# Altium PCB StartV2.PcbDoc
Units mil, origin at the board's own origin, x right, y up, seen from the top; angles counter-clockwise.
Board outline 3760 x 2060 mil, 2 copper layers (Top Layer, Bottom Layer); 42 components, 54 nets, 236 pads, 0 vias.
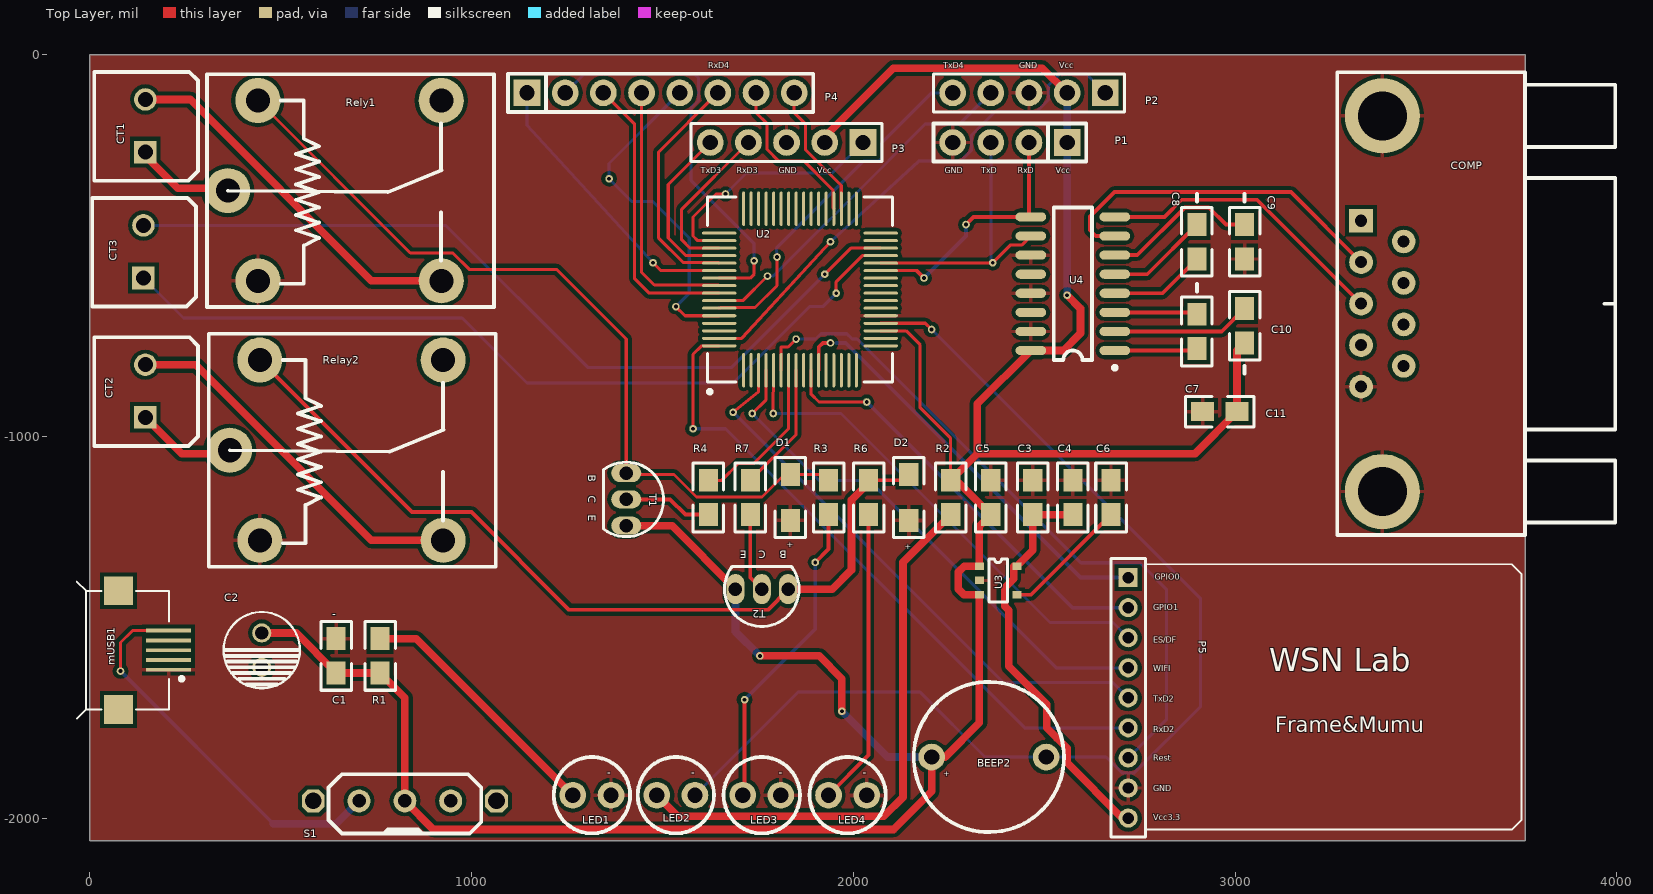
[diagram p0: Top Layer view]
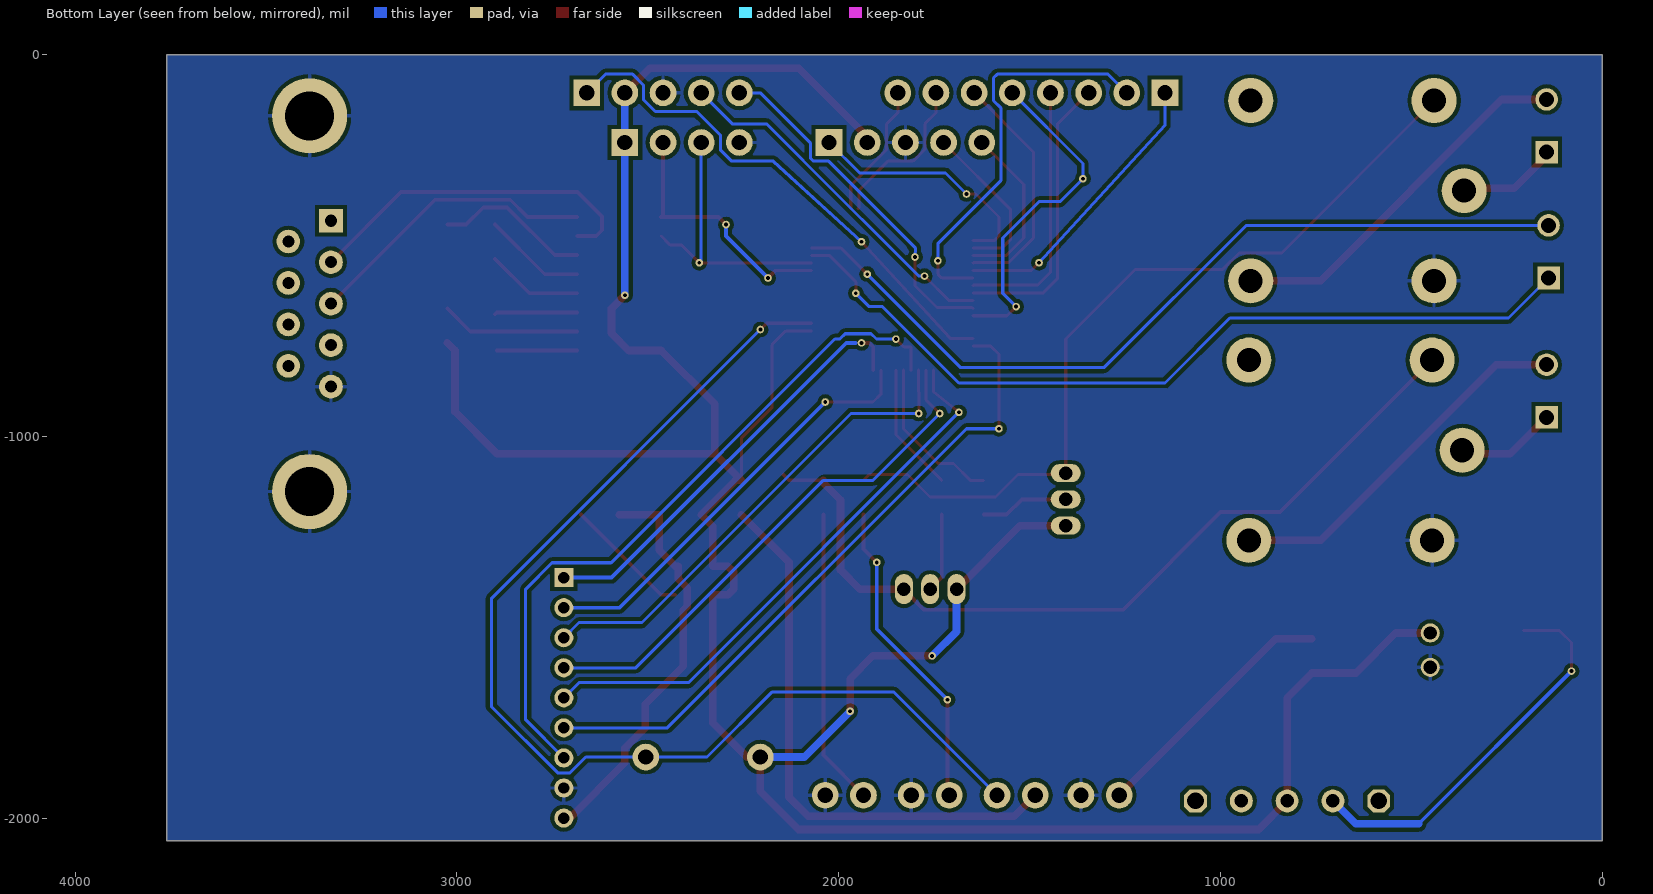
[diagram p1: Bottom Layer view, seen from below]

## Layer stack, top to bottom
Top Layer: signal copper 1.4
Dielectric: dielectric 12.6, FR-4, Dk 4.8
Bottom Layer: signal copper 1.4

## Board outline
0,-2060 3760,-2060 3760,0 0,0

## Design rules (kind name [scope] priority, off if disabled: settings)
Clearance [All] p1: gap=10
HoleSize [All] p1: absolutevalues=TRUE maxlimit=130 minlimit=1 maxpercent=80.000 minpercent=20.000
PolygonConnect [All] p1: connectstyle=Relief reliefconductorwidth=10 reliefentries=4 polygonreliefangle="90 Angle" airgapwidth=10
RoutingVias [All] p1: holewidth=28 width=50 viastyle="Through Hole" minholewidth=28 minwidth=50 maxholewidth=28 maxwidth=50
SolderMaskExpansion [All] p1: expansion=4
Width [All] p1: maxlimit=30 minlimit=6 preferedwidth=10
27 further rules are at their usual default settings.

## Components (designator, comment, footprint, x,y, rotation, side; value= is the part's Value field where it differs from the comment)
BEEP2 "BEEP" BEEP 2205,-1840 r0 top
C1 "104" CAP 645,-1530 r270 top
C2 "10uF" capc 450,-1515 r0 top
C3 "105" CAP 2470,-1205 r90 top
C4 "104" CAP 2575,-1205 r90 top
C5 "105" CAP 2360,-1205 r90 top
C6 "223" CAP 2675,-1205 r90 top
C7 "104" CapE 2900,-770 r90 top
C8 "104" CapE 2900,-535 r90 top
C9 "104" CapE 3025,-535 r90 top
C10 "104" CapE 3025,-665 r270 top
C11 "104" CAP 2915,-935 r0 top
COMP "RS232" DB9 3330,-435 r270 top
CT1 "ConTerminal" ConTerminal 145,-255 r90 top
CT2 "ConTerminal" ConTerminal 145,-950 r90 top
CT3 "ConTerminal" ConTerminal 140,-585 r90 top
D1 "D4148" D4148_1206 1835,-1220 r90 top
D2 "D4148" D4148_1206 2145,-1220 r90 top
LED1 "LED_3mm" LED_3mm 1265,-1940 r0 top
LED2 "LED_3mm" LED_3mm 1485,-1940 r0 top
LED3 "LED_3mm" LED_3mm 1710,-1940 r0 top
LED4 "LED_3mm" LED_3mm 1935,-1940 r0 top
mUSB1 "mUSB" mUSB -10,-1560 r180 top
P1 "pin4" pin4 2410,-230 r180 top
P2 "pin5" pin5 2660,-100 r180 top
P3 "pin5" pin5 2025,-230 r180 top
P4 "pin8" pin8 1145,-100 r0 top
P5 "WiFi" WiFi 2765,-1680 r270 top
R1 "200" res 760,-1620 r90 top
R2 "1k" res 2255,-1115 r270 top
R3 "4.7k" res 1935,-1205 r90 top
R4 "100" res 1620,-1205 r90 top
R6 "4.7k" res 2040,-1205 r90 top
R7 "100" res 1730,-1205 r90 top
Relay2 "继电器-Stop" 继电器-SRD 445,-800 r0 top
Rely1 "继电器-Start" 继电器-SRD 440,-120 r0 top
S1 "Horizontal_Switch" Horizontal_Switch 705,-1955 r0 top
T1 "8550" PNP 1405,-1165 r180 top
T2 "8550" PNP 1760,-1400 r90 top
U2 "STC8A8K64S4A12_LQFP64" STC8A8K64S4A12_LQFP64S 1860,-615 r90 top
U3 "RT9193-33" RT9193-33 2330,-1340 r0 top
U4 "MAX232" MAX232 2685,-775 r180 top

## Footprints (in the part's own frame and the unit in brackets; to place one, negate y for a bottom-side part, rotate by r counter-clockwise, add the part's x,y. Pads: shape width x height; smd on the part's side, far side on the other; paste and mask are expansions set on the pad)
BEEP [mil]
  round 70 hole 40: 1(0,0) 2(300,0)
  silkscreen extent -47,-197 347,197
CAP [mil]
  rect 60x50 smd: 1(0,0) 2(90,0)
  silkscreen extent -45,-40 135,40
capc [mil]
  round 50 hole 35: 1(0,0) 2(0,-90)
  silkscreen extent -100,-145 100,55
CapE [mil]
  rect 60x50 smd: 1(0,0) 2(90,0)
  silkscreen extent -45,-40 170,40
ConTerminal [mm]
  rect 1.5x1.5 hole 1: 1(0,0)
  round 1.5 hole 1: 2(3.5,0)
  silkscreen extent -1.91,-3.5 5.33,3.4
D4148_1206 [mil]
  rect 60x50 smd: 1(0,0) 2(120,0)
  silkscreen extent -45,-40 165,40
DB9 [mm]
  rect 1.575x1.575 hole 0.8: 1(0,0)
  round 1.575 hole 0.8: 2(2.76,0) 3(5.52,0) 4(8.28,0) 5(11.04,0) 6(1.38,2.84) 7(4.14,2.84) 8(6.9,2.84) 9(9.66,2.84)
  round 5 hole 3.25: 10(-6.98,1.42) 11(18.02,1.42)
  silkscreen extent -9.88,-1.58 20.92,16.92, body extent -9.93,-2.01 20.88,17.06, height 12.81
Horizontal_Switch [mil]
  round 60 hole 35.43: 1(0,0) 2(120,0) 3(240,0)
  oct 60x60 hole 43.31: 4(-120,0) 5(360,0)
  silkscreen extent -80,-85 320,70
LED_3mm [mil]
  round 70 hole 40: 1(0,0) 2(100,0)
  silkscreen extent -50,-100 150,100
MAX232 [mil]
  oval 80x24 smd: 1(0,0) 2(0,-50) 3(0,-100) 4(0,-150) 5(0,-200) 6(0,-250) 7(0,-300) 8(0,-350) 9(220,-350) 10(220,-300) 11(220,-250) 12(220,-200) 13(220,-150) 14(220,-100) 15(220,-50) 16(220,0)
  silkscreen extent -5,-375 160,50
mUSB [mm]
  rect 3x0.25 smd: D+(-5.486,0) D-(-5.486,-0.65) GND(-5.486,1.3) ID(-5.486,0.65) VCC(-5.486,-1.3)
  rect 1.9x1.9 smd: ""(-2.15,3.95) ""(-2.15,-3.95)
  silkscreen extent -6.47,-4.57 0.63,4.57
pin4 [mil]
  rect 70x70 hole 40: 1(-150,0)
  round 70 hole 40: 2(-50,0) 3(50,0) 4(150,0)
  silkscreen extent -200,-50 200,50
pin5 [mil]
  rect 70x70 hole 40: 1(0,0)
  round 70 hole 40: 2(100,0) 3(200,0) 4(300,0) 5(400,0)
  silkscreen extent -50,-50 450,50
pin8 [mil]
  rect 70x70 hole 40: 1(0,0)
  round 70 hole 40: 2(100,0) 3(200,0) 4(300,0) 5(400,0) 6(500,0) 7(600,0) 8(700,0)
  silkscreen extent -50,-50 750,50
PNP [mm]
  oval 2x1.2 hole 0.9: 1(0,1.75) 2(0,0) 3(0,-1.75)
  silkscreen extent -2.48,-2.48 1.5,2.48, body extent -2.5,-2.5 1.5,2.5, height 7
res [mil]
  rect 60x50 smd: 1(0,0) 2(90,0)
  silkscreen extent -45,-40 135,40
RT9193-33 [mm]
  rect 0.6x0.5 smd: 1(0,0) 2(0,-0.95) 3(0,-1.9) 4(2.5,-1.9) 5(2.5,0)
  silkscreen extent 0.63,-2.38 1.87,0.48
STC8A8K64S4A12_LQFP64S [mm] "STC8A8K64S4A12_LQFP64S"
  oval 2.286x0.2 smd: 1(-5.375,3.75) 2(-5.375,3.25) 3(-5.375,2.75) 4(-5.375,2.25) 5(-5.375,1.75) 6(-5.375,1.25) 7(-5.375,0.75) 8(-5.375,0.25) 9(-5.375,-0.25) 10(-5.375,-0.75) 11(-5.375,-1.25) 12(-5.375,-1.75) 13(-5.375,-2.25) 14(-5.375,-2.75) 15(-5.375,-3.25) 16(-5.375,-3.75) 33(5.375,-3.75) 34(5.375,-3.25) 35(5.375,-2.75) 36(5.375,-2.25) 37(5.375,-1.75) 38(5.375,-1.25) 39(5.375,-0.75) 40(5.375,-0.25) 41(5.375,0.25) 42(5.375,0.75) 43(5.375,1.25) 44(5.375,1.75) 45(5.375,2.25) 46(5.375,2.75) 47(5.375,3.25) 48(5.375,3.75)
  oval 0.2x2.286 smd: 17(-3.75,-5.375) 18(-3.25,-5.375) 19(-2.75,-5.375) 20(-2.25,-5.375) 21(-1.75,-5.375) 22(-1.25,-5.375) 23(-0.75,-5.375) 24(-0.25,-5.375) 25(0.25,-5.375) 26(0.75,-5.375) 27(1.25,-5.375) 28(1.75,-5.375) 29(2.25,-5.375) 30(2.75,-5.375) 31(3.25,-5.375) 32(3.75,-5.375) 49(3.75,5.375) 50(3.25,5.375) 51(2.75,5.375) 52(2.25,5.375) 53(1.75,5.375) 54(1.25,5.375) 55(0.75,5.375) 56(0.25,5.375) 57(-0.25,5.375) 58(-0.75,5.375) 59(-1.25,5.375) 60(-1.75,5.375) 61(-2.25,5.375) 62(-2.75,5.375) 63(-3.25,5.375) 64(-3.75,5.375)
  silkscreen extent -6.92,-6.15 6.15,6.15, body extent -6,-6 6,6, height 1.6
WiFi [mil]
  rect 50x50 hole 30: 1(-310,-45)
  round 50 hole 30: 2(-231.26,-45) 3(-152.52,-45) 4(-73.78,-45) 5(4.96,-45) 6(83.7,-45) 7(162.44,-45) 8(241.18,-45) 9(319.92,-45)
  silkscreen extent -360,-90 370,985
继电器-SRD [mm]
  round 3 hole 1.6: 1(0,0) 2(0,-12) 3(-2,-6) 4(12.2,0) 5(12.2,-12)
  silkscreen extent -3.4,-13.75 15.7,1.75

## Part data
C1 C3 C4 C5 C6 C11: library part CAP
C2: library part CAPC
C7 C8 C9 C10: library part CapE
D1 D2: library part D4148_1206
R1 R2 R3 R4 R6 R7: library part RES
Relay2 Rely1: library part 继电器-SRD
T1 T2: library part PNP

## Free pads (board coordinates)
  round 20 hole 10: 0(80,-1615) 3(2560,-630) 4(2035,-910) 6(1685,-936.95) 7(1735,-940) 8(1790,-940) 9(1850,-745) 10(1580,-980) 11(1940,-755) 12(2295,-445) 13(2185,-585) 14(2205,-720) 17(1665,-365) 18(1475,-545) 19(1740,-540) 21(1535,-660) 22(1360,-325) 23(1775,-580) 24(1800,-530) 25(1940,-490) 26(2365,-545) 27(1955,-625) 28(1925,-575) 30(1900,-1330) 31(1715,-1690) 32(1970,-1720) 33(1755,-1575)

## Nets (pads, with @x,y where several pads share a name; then routed paths per layer and width w, separated by ;. In a path a pad name is that pad's centre, name@x,y a point inside that pad or via, vN(x,y) a via of type N, cw(c..) or ccw(c..) an arc to the next point about the centre after c; other vN are vias at no path point)
ES/DF: P5.3 pad.8 U2.5 | length 1286.7
  Top Layer w8: pad.8 U2.5
  Bottom Layer w8: pad.8 1967.37,-940 2515.11,-1487.74 2680.26,-1487.74 P5.3
GND: C1.1 C2.2 C3.2 C4.2 C5.2 C6.2 C9.1 C11.1 COMP.5 COMP.10 COMP.11 D1.1 D2.1 LED1.2 LED3.2 LED4.2 mUSB1.GND P1.4 P2.3 P3.3 P5.8 Relay2.2 Rely1.2 U2.21 U3.2 U4.11 U4.13 U4.15
GPIO0: P5.1 pad.11 U2.11 | length 1115.8
  Top Layer w10: U2.11 1909.21,-765.79 1920,-755 pad.11
  Bottom Layer w10: 1955,-755 1980,-755 2595,-1370 P5.1
GPIO1: P5.2 pad.4 U2.10 | length 1125
  Top Layer w8: U2.10 1889.53,-889.53 1910,-910 pad.4
  Bottom Layer w10: pad.4 2573.74,-1448.74 P5.2
KEY_START: CT3.1 pad.27 U2.29 | length 2201.3
  Top Layer w8: pad.27 1955,-595 2023.58,-526.42 U2.29
  Bottom Layer w8: CT3.1 245,-690 975.08,-690 1145.08,-860 1685,-860 1885,-660 1920,-660 pad.27
KEY_STOP: CT3.2 pad.28 U2.30 | length 2215.8
  Top Layer w8: pad.28 1993.27,-506.73 U2.30
  Bottom Layer w8: CT3.2 932.2,-447.2 1305,-820 1680,-820 pad.28
NetC6_1: C6.1 U3.4 | length 333.5
  Top Layer w10: U3.4 2465.2,-1414.8 C6.1
NetC7_1: C7.1 U4.1 | length 210
  Top Layer w10: U4.1 C7.1@2895,-775
NetC7_2: C7.2 U4.3 | length 217.1
  Top Layer w10: U4.3 2895,-675 C7.2
NetC8_1: C8.1 U4.4 | length 252.3
  Top Layer w10: U4.4 2810,-625 C8.1
NetC8_2: C8.2 U4.5 | length 268.8
  Top Layer w10: U4.5 2770,-575 C8.2
NetC9_2: C9.2 U4.6 | length 410.4
  Top Layer w10: U4.6 2743.79,-525 2868.79,-400 2931.21,-400 2976.21,-445 C9.2
NetC10_1: C10.1 U4.2 | length 364.9
  Top Layer w10: U4.2 2965,-725 C10.1
NetCOMP_2: COMP.2 U4.7 | length 919.9
  Top Layer w10: U4.7 2635,-475 2620,-460 2620,-423.82 2683.82,-360 3146.34,-360 COMP.2
NetCOMP_3: COMP.3 U4.8 | length 776.4
  Top Layer w10: U4.8 2815.5,-425 2860.5,-380 3057.68,-380 COMP.3
NetCT1_1: CT1.1 Rely1.3 | length 264
  Top Layer w20: CT1.1 145,-265 230,-350 355.04,-350 Rely1.3
NetCT1_2: CT1.2 Rely1.5 | length 972.2
  Top Layer w20: CT1.2 262.2,-117.2 737.44,-592.44 Rely1.5
NetCT2_1: CT2.1 Relay2.3 | length 264.2
  Top Layer w20: CT2.1 240,-1045 357.48,-1045 Relay2.3
NetCT2_2: CT2.2 Relay2.5 | length 971
  Top Layer w20: CT2.2 277.2,-812.2 737.44,-1272.44 Relay2.5
NetD1_2: D1.2 R3.2 Rely1.1 T1.3 | length 2150.6
  Top Layer w8: Rely1.1 839.39,-519.39 950.58,-519.39 993.37,-562.18 1222.18,-562.18 1405,-745 T1.3@1405,-1085 ; T1.3 1408.9,-1100 1530.2,-1100 1589.2,-1159 1760.8,-1159 1819.8,-1100 D1.2 1920,-1100 R3.2
NetD2_2: D2.2 R6.2 Relay2.1 T2.3 | length 2230
  Top Layer w10: Relay2.1 843.39,-1198.39 999.37,-1198.39 1255.35,-1454.37 1776,-1454.37 1828.9,-1401.47 T2.3 ; R6.2 2130,-1115 D2.2
  Top Layer w20: T2.3 1945,-1400 1995,-1350 1995,-1166.72 2040,-1121.72 R6.2
NetLED1_1: LED1.1 R1.2 | length 674.8
  Top Layer w20: R1.2 855,-1530 LED1.1
NetLED2_1: LED2.1 R2.2 | length 1480.3
  Top Layer w20: LED2.1 1540,-1995 2080,-1995 2130,-1945 2130,-1330 R2.2
NetLED3_1: LED3.1 pad.30 pad.31 R3.1 | length 828.2
  Top Layer w10: LED3.1 1715,-1935 pad.31 ; pad.30 1935,-1295 R3.1
  Bottom Layer w10: pad.31 1900,-1505 pad.30
NetLED4_1: LED4.1 R6.1 | length 778.5
  Top Layer w10: LED4.1 2040,-1835 R6.1
NetmUSB1_VCC: mUSB1.VCC pad.0 S1.1 | length 1029.5
  Top Layer w8: pad.0 80,-1540 111.18,-1508.82 mUSB1.VCC
  Bottom Layer w10: pad.0 480,-2015
  Bottom Layer w20: 480,-2015 645,-2015 S1.1
NetR4_1: R4.1 T1.2 | length 231.6
  Top Layer w10: T1.2 1520,-1165 1560,-1205 R4.1
NetR7_1: R7.1 T2.2 | length 207.4
  Top Layer w10: R7.1 1730,-1370 T2.2
P02: P4.6 U2.53 | length 630.2
  Top Layer w8: P4.6 1490,-255 1490,-480.46 1553.96,-544.42 1646.7,-544.42 U2.53
P04: P4.5 pad.21 pad.22 U2.60 | length 893.6
  Top Layer w8: pad.21 1558.9,-683.9 U2.60
  Bottom Layer w8: pad.21 1570,-625 1570,-480 1475,-385 1420,-385 pad.22 1360,-285 P4.5
P36: P4.8 U2.35 | length 354.4
  Top Layer w8: P4.8 1845,-152 1874,-181 1874,-248.3 1968.27,-342.56 U2.35
P37: P4.7 U2.36 | length 426.5
  Top Layer w8: P4.7 1745,-152 1774,-181 1774,-248.3 1804.7,-279 1870.94,-279 1946.83,-354.89 1946.83,-401.64 U2.36
P74: P4.1 pad.18 U2.54 | length 755.4
  Top Layer w8: pad.18 1495.79,-565.79 U2.54
  Bottom Layer w8: P4.1 1145,-185 pad.18
P75: P4.2 pad.19 U2.55 | length 1059.8
  Top Layer w8: U2.55 1729.53,-585.47 1740,-575 pad.19
  Bottom Layer w8: P4.2 1294,-51 1584.3,-51 1594,-60.7 1594,-120.3 1575,-139.3 1575,-330 1740,-495 pad.19
P76: P4.4 U2.56 | length 687.9
  Top Layer w8: P4.4 1445,-570 1478.41,-603.41 1646.64,-603.41 U2.56
P77: P4.3 U2.57 | length 758
  Top Layer w8: P4.3 1427,-182 1427,-587 1464.84,-624.84 U2.57
RESET: P5.7 pad.9 U2.6 | length 1849.6
  Top Layer w8: U2.6 1810.79,-765.79 1829.21,-765.79 pad.9 pad.9@1845.66,-745
  Bottom Layer w8: pad.9 1901,-745 1915,-731 1982.87,-731 1996.87,-745 2010,-745 2596,-1331 2750.8,-1331 2820,-1400.2 2820,-1742.44 P5.7
RXD: P1.2 pad.12 pad.13 U2.27 U4.9 | length 682.3
  Top Layer w8: U2.27 2165.79,-565.79
  Top Layer w10: 2165.79,-565.79 pad.13 ; pad.12 2315,-425 U4.9 2460,-420 P1.2
  Bottom Layer w10: pad.13 2295,-475 pad.12
RXD2: P5.6 pad.10 U2.64 | length 1737.3
  Top Layer w8: pad.10 1580,-785 1602.36,-762.64 U2.64
  Bottom Layer w8: pad.10 1665,-980 2448.7,-1763.7 P5.6
RXD3: P3.4 U2.51 | length 434.9
  Top Layer w8: U2.51 1571.73,-506.73 1550,-485 1550,-405 P3.4
RXD4: P2.4 pad.23 U2.58 | length 937.3
  Top Layer w8: U2.58 1710.47,-644.53 pad.23
  Bottom Layer w8: pad.23 1790.25,-580 2092,-278.25 2092,-278 2189,-181 2279,-181 P2.4
SCK: U2.12
SET1: P2.1 pad.25 U2.63 | length 1364.4
  Top Layer w8: U2.63 1707.05,-742.95 pad.25
  Bottom Layer w8: pad.25 2171,-279 2280.3,-279 2309,-250.3 2309,-211.7 2371.7,-149 2480.3,-149 2511,-118.3 2511,-79.7 2539.7,-51 2611,-51 P2.1
SET2: P3.1 pad.17 U2.50 | length 649.1
  Top Layer w8: U2.50 1592.05,-487.05 1580,-475 1580,-425 1640,-365 pad.17
  Bottom Layer w8: pad.17 1720,-310 1945,-310 P3.1
START: R4.2 U2.7 | length 419.5
  Top Layer w8: R4.2 1655.2,-1115 1699.2,-1071 1739,-1071 1830.47,-979.53 U2.7
STATUS: BEEP2.2 LED2.2 pad.14 U2.20 | length 3016.2
  Top Layer w8: U2.20 2188.58,-703.58 pad.14
  Bottom Layer w8: LED2.2 1855,-1670 2175,-1670 2345,-1840 BEEP2.2 2662.4,-1840 2703.85,-1881.44 2736.15,-1881.44 2910,-1707.6 2910,-1425 pad.14
STOP: R7.2 U2.8 | length 338.2
  Top Layer w8: R7.2 1850.16,-994.84 U2.8
TXD: P1.3 pad.26 U2.28 U4.10 | length 739.9
  Top Layer w8: U2.28 2363.9,-546.1 pad.26 2411,-499 2441,-499 U4.10
  Bottom Layer w8: P1.3 2360,-540 pad.26
TXD2: P5.5 pad.6 U2.3 | length 1487.1
  Top Layer w8: pad.6 1751.73,-883.27 U2.3
  Bottom Layer w8: pad.6 2393.27,-1645.22 2680.26,-1645.22 P5.5
TXD3: P3.5 U2.52 | length 448.2
  Top Layer w8: P3.5 1515,-340 1515,-480 1561.42,-526.42 U2.52
TXD4: P2.5 pad.24 U2.59 | length 927.6
  Top Layer w8: U2.59 1650.07,-662.53 1742.47,-662.53 1800,-605 pad.24
  Bottom Layer w8: pad.24 1799,-506 2026,-279 2065.8,-279 2074,-270.8 2074,-231 2205,-100 P2.5
VCC: BEEP2.1 C1.2 C2.1 C5.1 C10.2 C11.2 P1.1 P2.2 P3.2 pad.3 pad.32 pad.33 R1.1 R2.1 S1.2 T1.1 T2.1 U2.19 U3.1 U3.3 U4.16 | length 7770.7
  Top Layer w8: U2.19 2138.27,-723.27 2175,-760 2175,-925 2255,-1005 R2.1
  Top Layer w20: C2.1 540,-1515 C1.2 R1.1 825,-1685 S1.2 900,-2030 2105,-2030 2205,-1930 BEEP2.1 2240,-1840 2330,-1750 U3.3 2289.8,-1414.8 2274.8,-1399.8 2274.8,-1355.2 2290,-1340 U3.1 2330,-1235 C5.1 2270,-1115 R2.1 2325,-1045 ; T1.1 1525,-1233.9 T2.1 ; pad.33 1910,-1575 1970,-1635 pad.32 ; P3.2 1925,-215 2105,-35 2495,-35 P2.2 ; pad.3 2595,-665 2595,-730 2550,-775 U4.16 2325,-915 2325,-1045 ; C10.2 3005,-775 C11.2 2895,-1045 2325,-1045
  Bottom Layer w20: T2.1 1691.1,-1511.1 pad.33 ; pad.32 2090,-1840 BEEP2.1 ; pad.3 P1.1 P2.2
VCC33: C3.1 C4.1 P5.9 U3.5 | length 1063
  Top Layer w20: C4.1 C3.1 2470,-1298.43 U3.5 2420,-1340 2420,-1373.29 2396.61,-1396.68 2396.61,-1444.65 2407.21,-1455.24 2407.21,-1602.21 2506.39,-1701.39 2506.39,-1763.61 2532.78,-1790 2560,-1817.22 2560,-1855 P5.9@2704.92,-1999.92
WIFI: P5.4 pad.7 U2.4 | length 1389.4
  Top Layer w8: pad.7 1771.42,-903.58 U2.4
  Bottom Layer w8: pad.7 1910,-1115 2040,-1115 2531.22,-1606.22 P5.4
pads on no net: COMP.1 COMP.4 COMP.6 COMP.7 COMP.8 COMP.9 mUSB1. mUSB1.D+ mUSB1.D- mUSB1.ID Relay2.4 Rely1.4 S1.3 S1.4 S1.5 U2.1 U2.2 U2.9 U2.13 U2.14 U2.15 U2.16 U2.17 U2.18 U2.22 U2.23 U2.24 U2.25 U2.26 U2.31 U2.32 U2.33 U2.34 U2.37 U2.38 U2.39 U2.40 U2.41 U2.42 U2.43 U2.44 U2.45 U2.46 U2.47 U2.48 U2.49 U2.61 U2.62 U4.12 U4.14

## Polygon pours and split planes (outlines as drawn)
GND on Top Layer "Top Layer-No Net" (solid, pour order 2): 0,0 0,-2060 3760,-2060 3760,0
GND on Bottom Layer "Top Layer-No Net" (solid, pour order 4): 0,0 0,-2060 3760,-2060 3760,0

## Silkscreen, mask and mechanical layers (free items; w line width, h text height)
Top Overlay:
  text "RxD4" at 1620,-35 h15
  text "TxD4" at 2235,-35 h15
  text "GND" at 2435,-35 h15
  text "Vcc" at 2540,-35 h15
  text "TxD3" at 1600,-310 h15
  text "RxD3" at 1695,-310 h15
  text "GND" at 1805,-310 h15
  text "Vcc" at 1905,-310 h15
  text "GND" at 2240,-310 h15
  text "TxD" at 2335,-310 h15
  text "RxD" at 2430,-310 h15
  text "Vcc" at 2530,-310 h15
  text "+" at 1825,-1290 h15
  text "+" at 2135,-1295 h15
  text "GPIO0" at 2790,-1375 h15
  text "GPIO1" at 2785,-1455 h15
  text "-" at 635,-1475 h20
  text "ES/DF" at 2785,-1540 h15
  text "WIFI" at 2785,-1615 h15
  text "WSN Lab" at 3090,-1615 h60
  text "TxD2" at 2785,-1695 h15
  text "RxD2" at 2785,-1775 h15
  text "Frame&Mumu" at 3105,-1775 h40
  text "Rest" at 2785,-1850 h15
  text "-" at 1355,-1890 h20
  text "-" at 1575,-1890 h20
  text "-" at 1805,-1890 h20
  text "-" at 2025,-1890 h20
  text "+" at 2235,-1890 h15
  text "GND" at 2785,-1930 h15
  text "Vcc3.3" at 2785,-2005 h15
Mechanical 1:
  the board outline again, w10

## Text inside footprints (layer, text, board x,y; h text height)
T1: Top Overlay "B" at 1305,-1100 h20 r270; Top Overlay "C" at 1305,-1155 h20 r270; Top Overlay "E" at 1305,-1205 h20 r270
T2: Top Overlay "B" at 1825,-1300 h20 r180; Top Overlay "C" at 1770,-1300 h20 r180; Top Overlay "E" at 1720,-1300 h20 r180